# Altium PCB MFC-Card-Template.PcbDoc
Units mm, origin at the board's own origin, x right, y up, seen from the top; angles counter-clockwise.
Board outline 100 x 100 mm, 4 copper layers (Top Layer, Int1 (GND), Int2 (PWR), Bottom Layer), stack 1.369 mm thick; 3 components, 30 nets, 472 pads, 0 vias.
Unrouted connection lines stored in the file: 17.
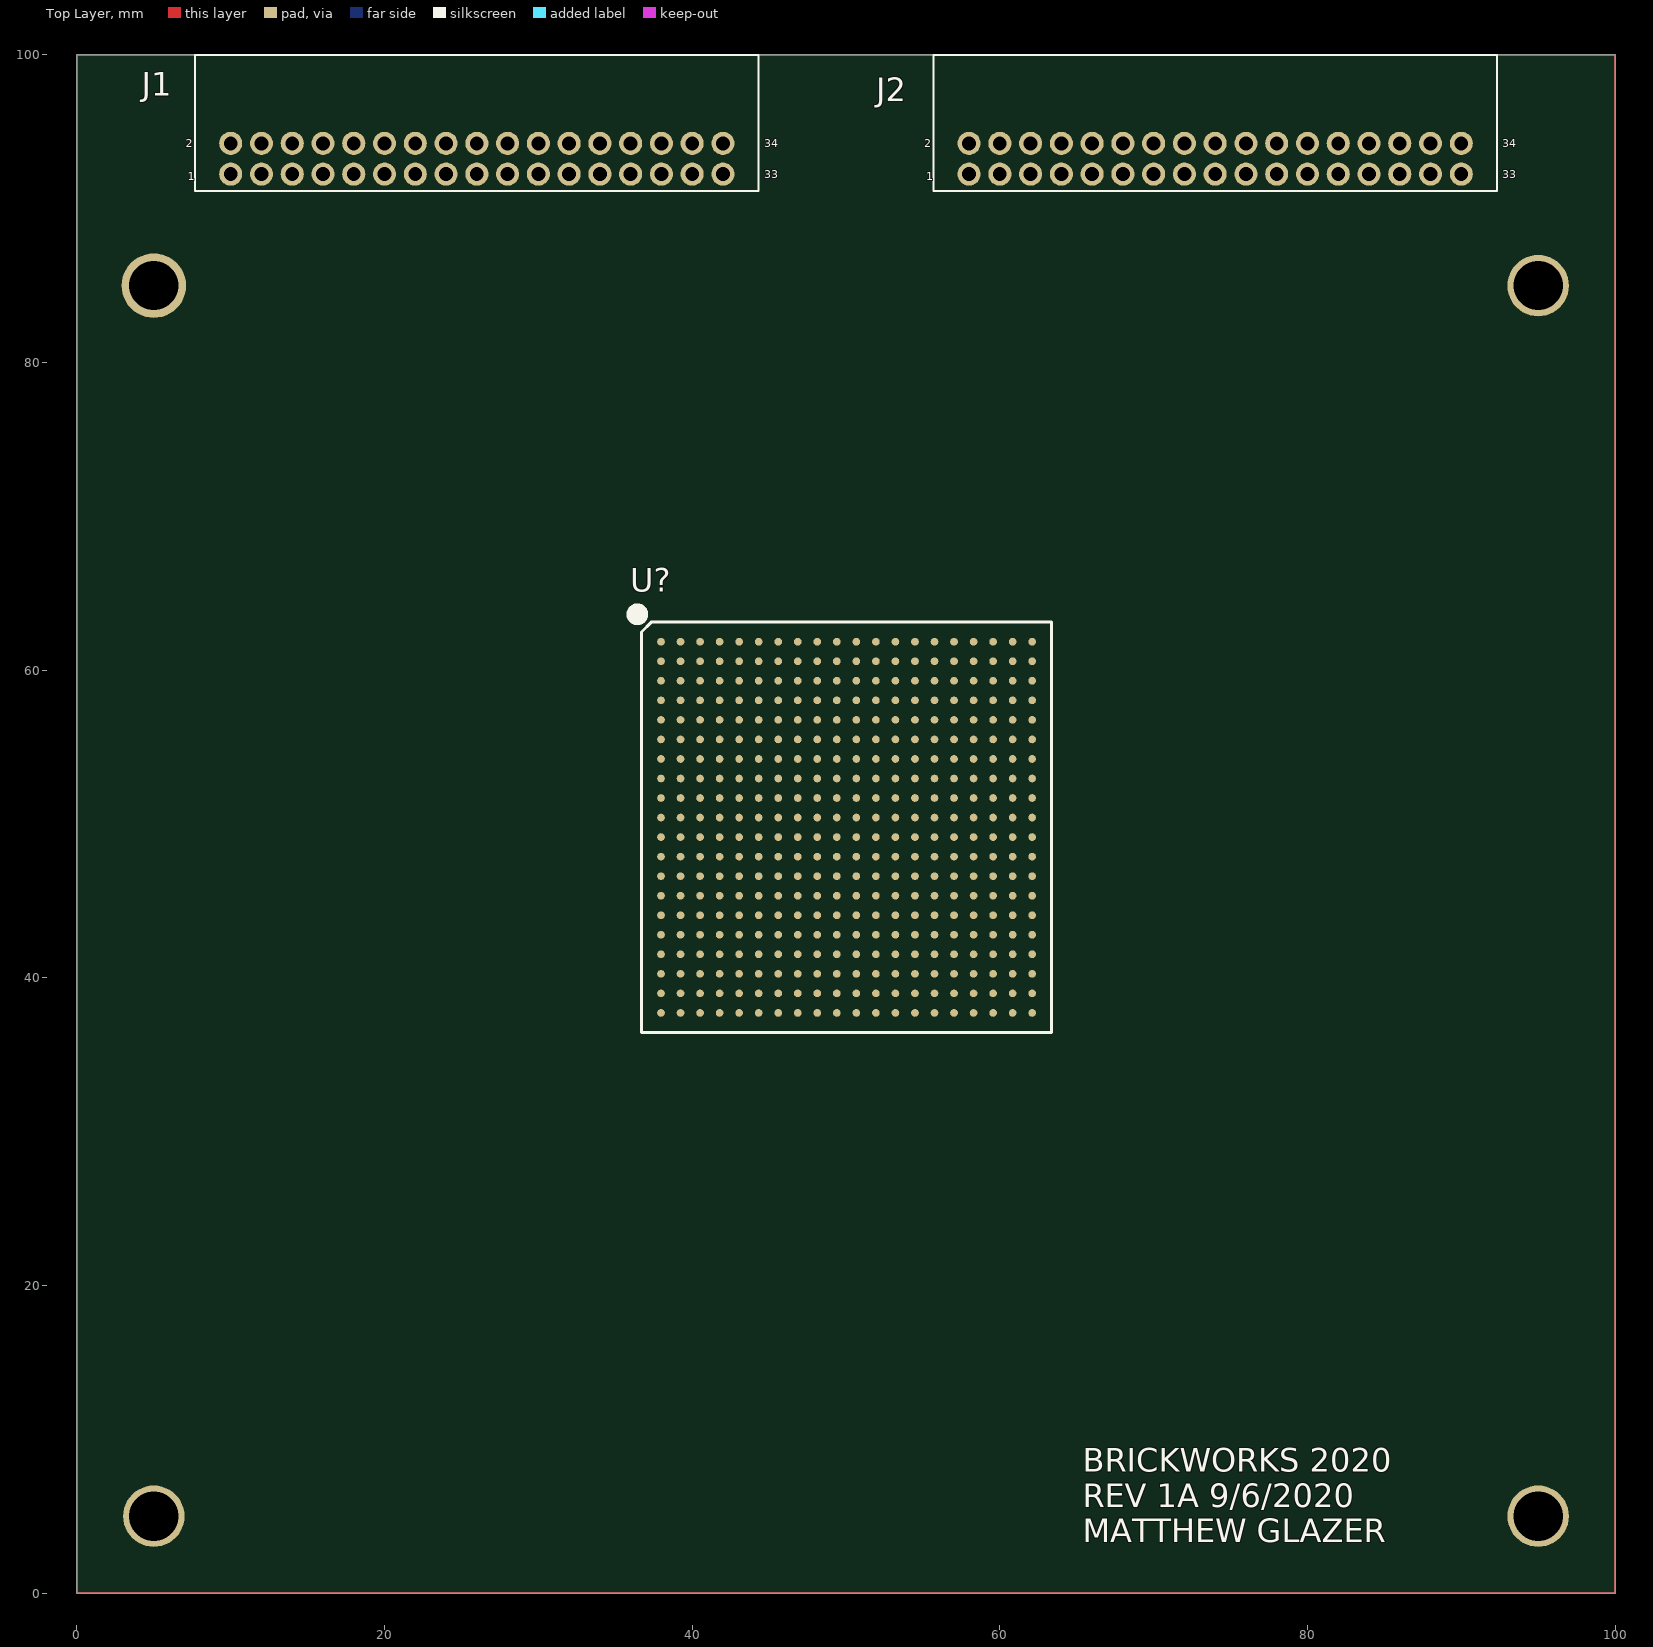
[diagram p0: Top Layer view]
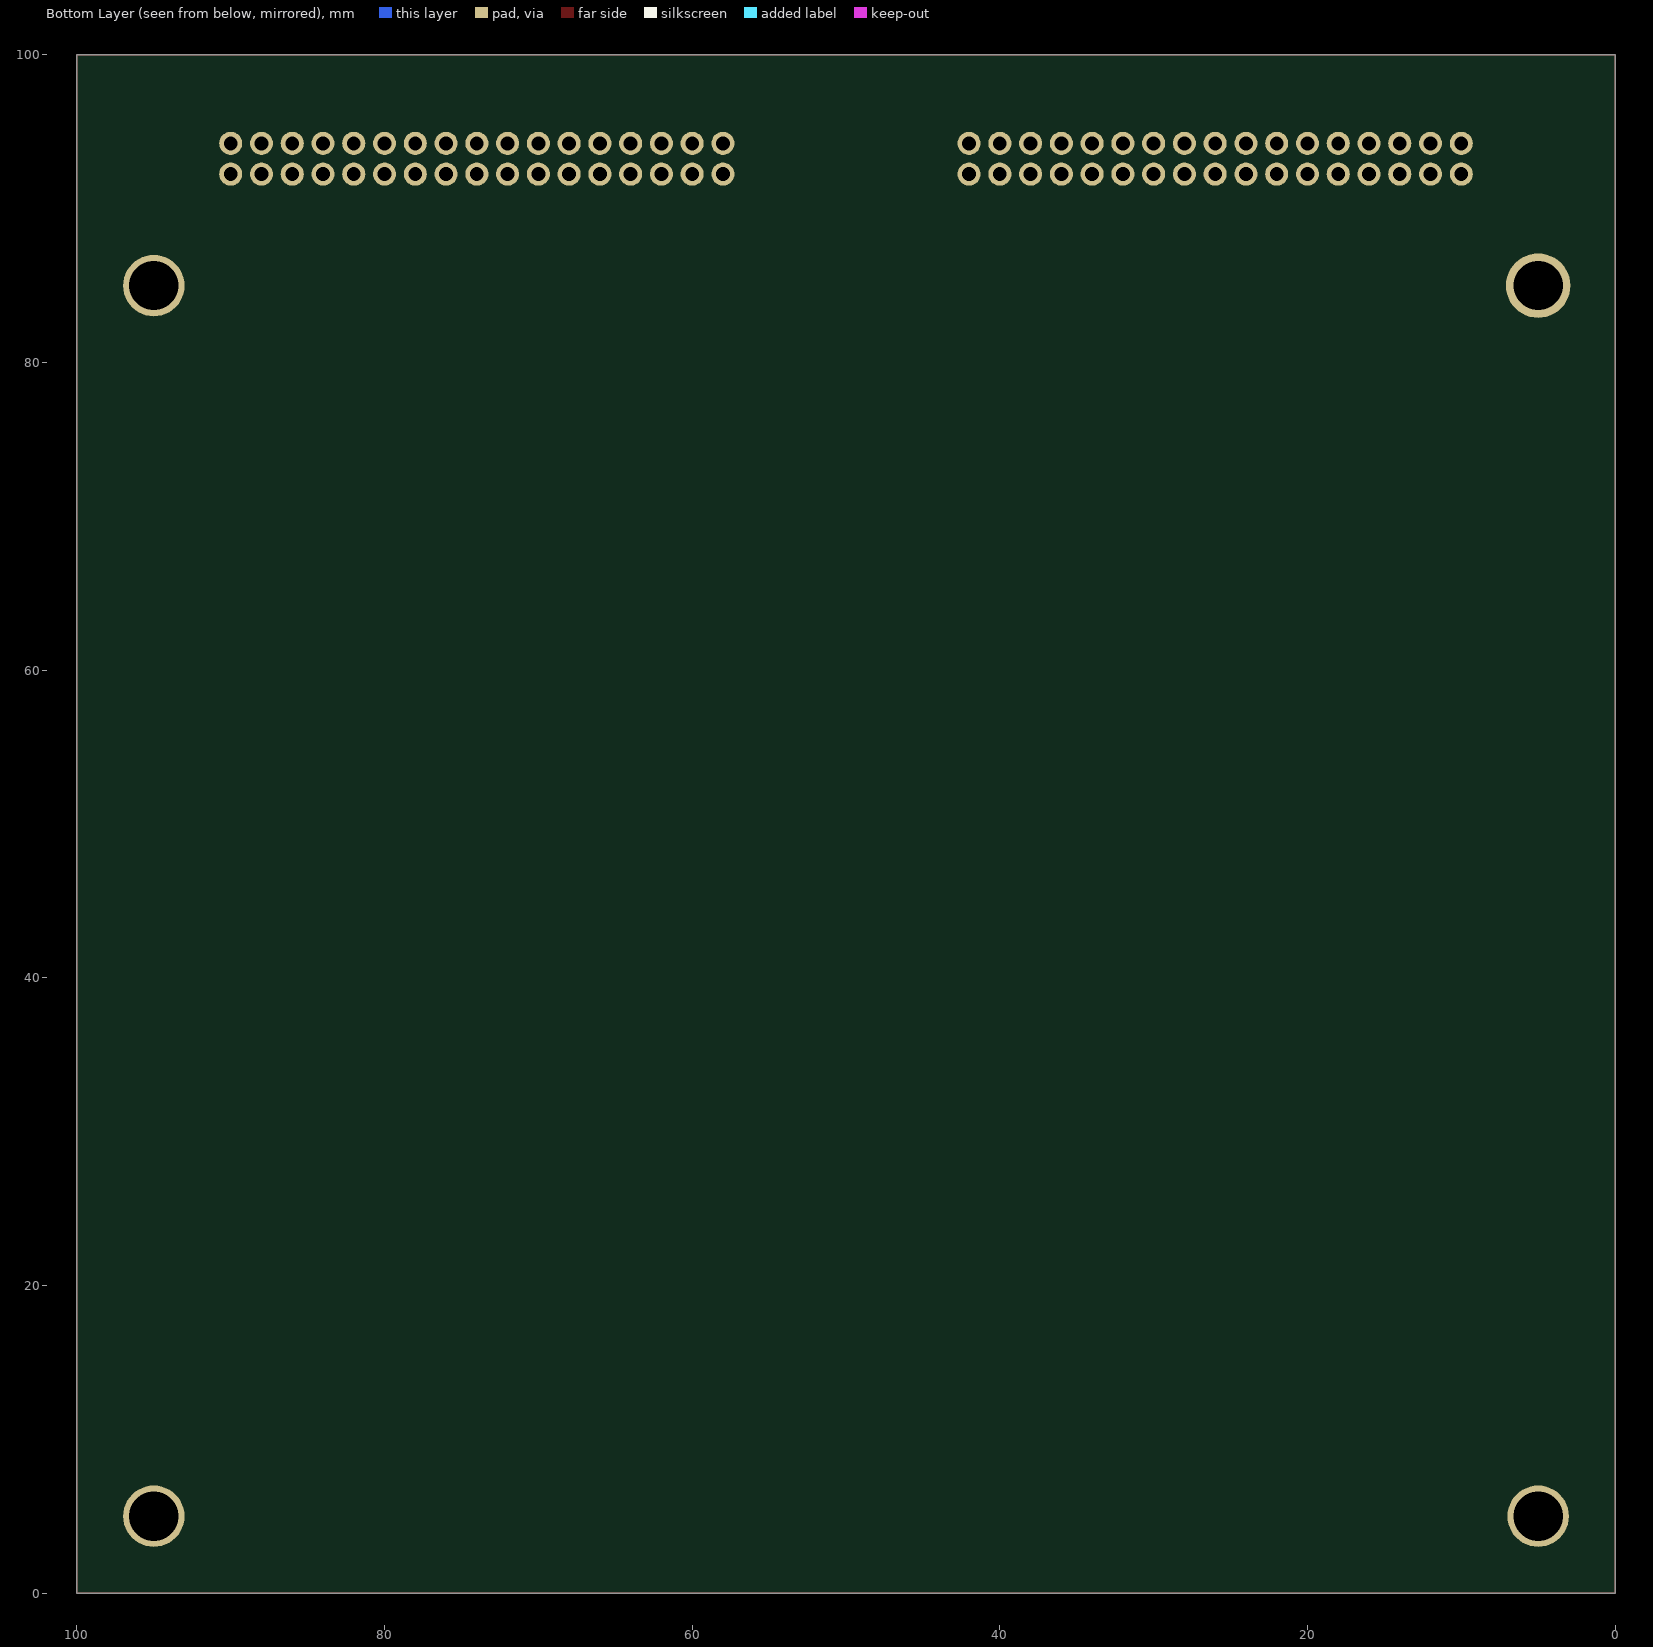
[diagram p1: Bottom Layer view, seen from below]
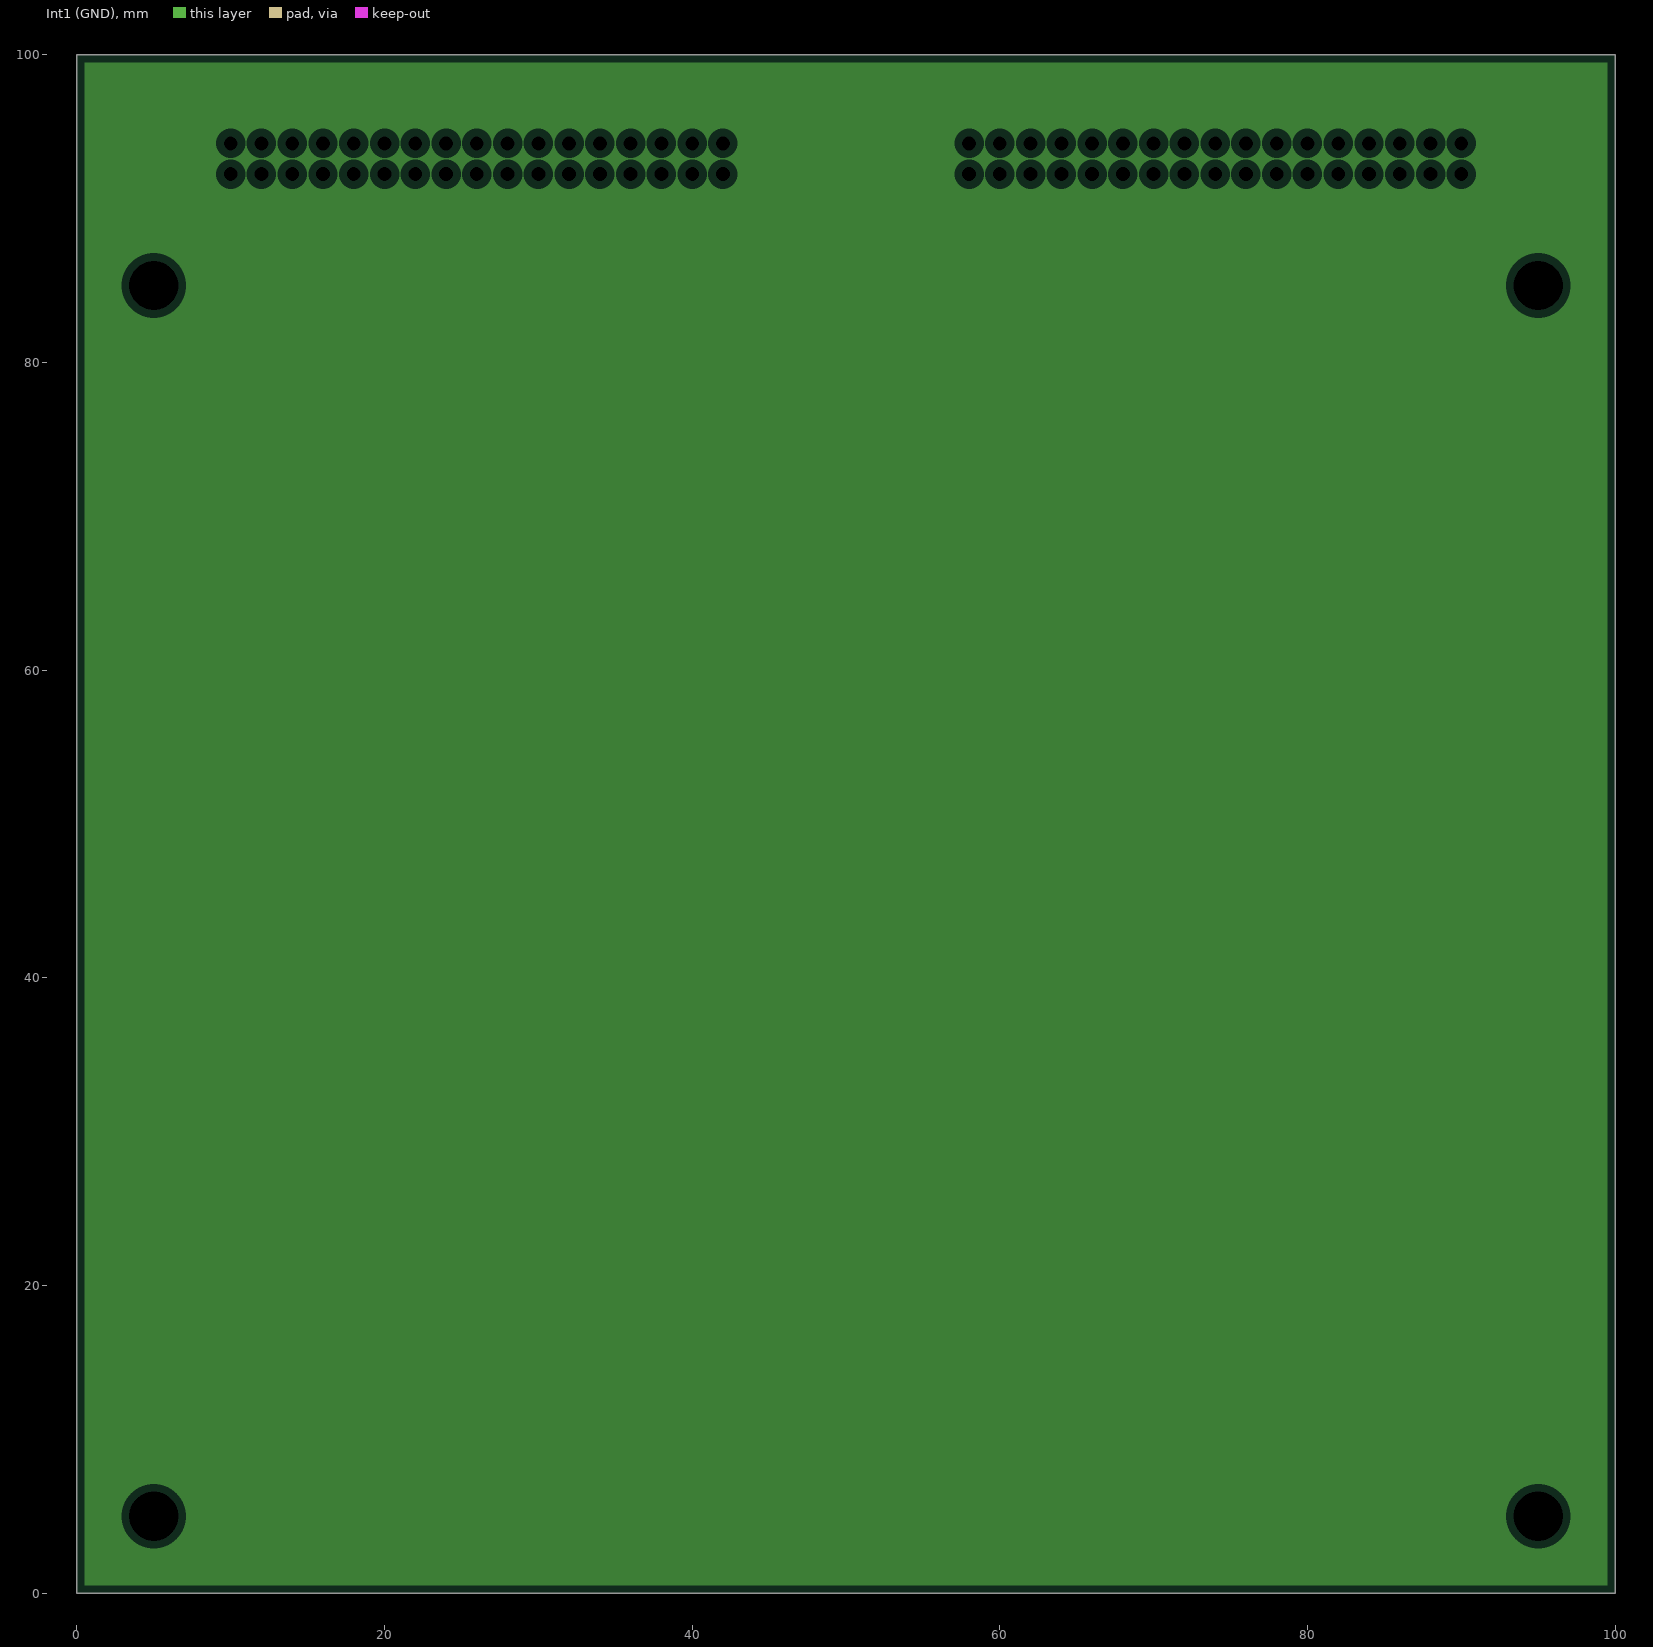
[diagram p2: Int1 (GND), clearances drawn from the general rule]
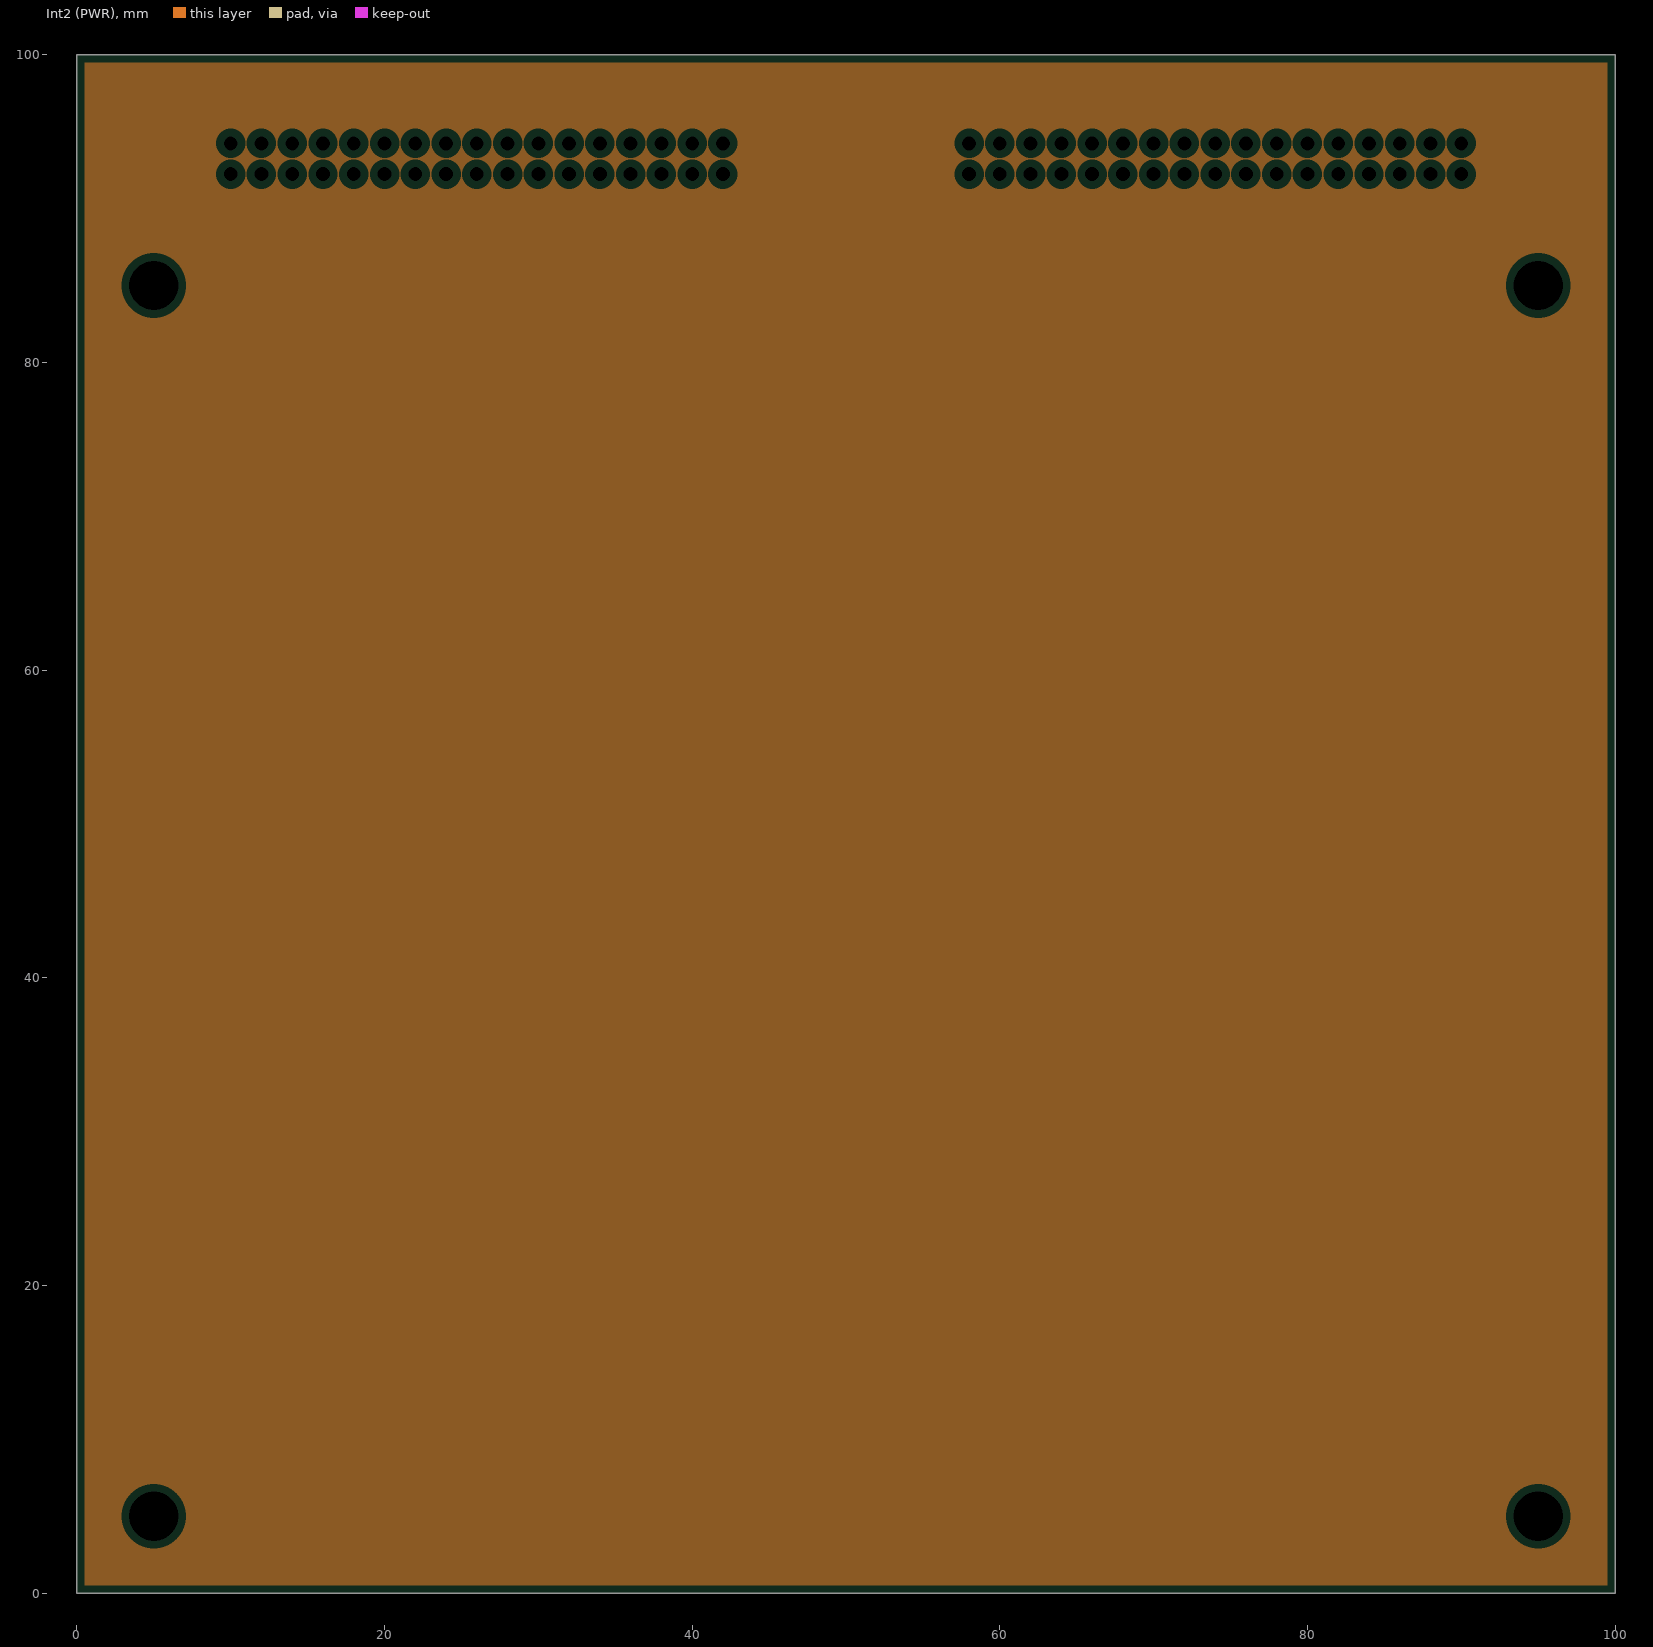
[diagram p3: Int2 (PWR), clearances drawn from the general rule]

## Layer stack, top to bottom
Top Solder: solder mask 0.0254, SM-001, Dk 4
Top Layer: signal copper 0.035
Dielectric 1: prepreg 0.1295, PP-017, Dk 4.3
Dielectric 2: prepreg 0.1295, PP-017, Dk 4.3
Int1 (GND): plane copper 0.035
Dielectric 3: core 0.7112, Core-039, Dk 4.8
Int2 (PWR): plane copper 0.035
Dielectric 4: prepreg 0.1295, PP-017, Dk 4.3
Dielectric 5: prepreg 0.1295, PP-017, Dk 4.3
Bottom Layer: signal copper 0.035
Bottom Solder: solder mask 0.0254, SM-001, Dk 4

## Board outline
0,0 100,0 100,100 0,100

## Design rules (kind name [scope] priority, off if disabled: settings)
Clearance [All] p1: gap=0.254 ignorepadtopadclearanceinfootprint=FALSE except(0: Arc-Hole Track-Hole SMDPad-Hole THPad-Hole Via-Hole Fill-Hole Poly-Hole Region-Hole Text-Hole)
PlaneClearance [All] p1: clearance=0.508
PlaneConnect [All] p1: planeconnectstyle=Relief reliefexpansion=0.508 reliefentries=4 reliefconductorwidth=0.254 reliefairgap=0.254
PolygonConnect [All] p1: connectstyle=Relief reliefconductorwidth=0.254 reliefentries=4 polygonreliefangle="90 Angle" airgapwidth=0.254
RoomDefinition Processor [InComponentClass('Processor')] p1: confinementstyle=ConfineIn formatcopy=TRUE lockcomponents=FALSE outline 101.092,1.524 216.535,1.524 216.535,64.77 101.092,64.77
RoomDefinition Interfaces [InComponentClass('Interfaces')] p2: confinementstyle=ConfineIn formatcopy=TRUE lockcomponents=FALSE outline 0,0 50.8,0 50.8,25.4 0,25.4
RoomDefinition Processor-2 [InComponentClass('Processor-2')] p3: confinementstyle=ConfineIn formatcopy=TRUE lockcomponents=FALSE outline 121.158,1.651 141.859,1.651 141.859,43.18 121.158,43.18
RoutingVias [All] p1: holewidth=0.711 width=1.27 viastyle="Through Hole" minholewidth=0.711 minwidth=1.27 maxholewidth=0.711 maxwidth=1.27
SolderMaskExpansion [All] p1: expansion=0.102
Width [All] p1: maxlimit=0.254 minlimit=0.254 preferedwidth=0.254
28 further rules are at their usual default settings.

## Classes and differential pairs
component class Interfaces: J1 J2

## Components (designator, comment, footprint, x,y, rotation, side; value= is the part's Value field where it differs from the comment)
J1 "0878333420" 0878333420 10,94.25 r0 top
J2 "0878333420" 0878333420 58,94.25 r0 top
U? "OSD3358-512M-ICB" BGA_20x20_400_1p27mm 50.018,49.764 r0 top

## Footprints (in the part's own frame and the unit in brackets; to place one, negate y for a bottom-side part, rotate by r counter-clockwise, add the part's x,y. Pads: shape width x height; smd on the part's side, far side on the other; paste and mask are expansions set on the pad)
0878333420 [mm] "34 pin milli-grid header, right-angle"
  round 1.5 hole 0.9: 1(0,-2) 2(0,0) 3(2,-2) 4(2,0) 5(4,-2) 6(4,0) 7(6,-2) 8(6,0) 9(8,-2) 10(8,0) 11(10,-2) 12(10,0) 13(12,-2) 14(12,0) 15(14,-2) 16(14,0) 17(16,-2) 18(16,0) 19(18,-2) 20(18,0) 21(20,-2) 22(20,0) 23(22,-2) 24(22,0) 25(24,-2) 26(24,0) 27(26,-2) 28(26,0) 29(28,-2) 30(28,0) 31(30,-2) 32(30,0) 33(32,-2) 34(32,0)
  silkscreen extent -2.32,-3.09 34.33,5.75, body extent -2.32,-2.25 34.33,6.4, height 6.35
BGA_20x20_400_1p27mm [mm] "400 pin 1.27mm pitch footprint"
  round 0.5 smd paste+0 mask+0.05: A1(-12.045,12.085) A2(-10.775,12.085) A3(-9.505,12.085) A4(-8.235,12.085) A5(-6.965,12.085) A6(-5.695,12.085) A7(-4.425,12.085) A8(-3.155,12.085) A9(-1.885,12.085) A10(-0.615,12.085) A11(0.655,12.085) A12(1.925,12.085) A13(3.195,12.085) A14(4.465,12.085) A15(5.735,12.085) A16(7.005,12.085) A17(8.275,12.085) A18(9.545,12.085) A19(10.815,12.085) A20(12.085,12.085) B1(-12.045,10.815) B2(-10.775,10.815) B3(-9.505,10.815) B4(-8.235,10.815) B5(-6.965,10.815) B6(-5.695,10.815) B7(-4.425,10.815) B8(-3.155,10.815) B9(-1.885,10.815) B10(-0.615,10.815) B11(0.655,10.815) B12(1.925,10.815) B13(3.195,10.815) B14(4.465,10.815) B15(5.735,10.815) B16(7.005,10.815) B17(8.275,10.815) B18(9.545,10.815) B19(10.815,10.815) B20(12.085,10.815) C1(-12.045,9.545) C2(-10.775,9.545) C3(-9.505,9.545) C4(-8.235,9.545) C5(-6.965,9.545) C6(-5.695,9.545) C7(-4.425,9.545) C8(-3.155,9.545) C9(-1.885,9.545) C10(-0.615,9.545) C11(0.655,9.545) C12(1.925,9.545) C13(3.195,9.545) C14(4.465,9.545) C15(5.735,9.545) C16(7.005,9.545) C17(8.275,9.545) C18(9.545,9.545) C19(10.815,9.545) C20(12.085,9.545) D1(-12.045,8.275) D2(-10.775,8.275) D3(-9.505,8.275) D4(-8.235,8.275) D5(-6.965,8.275) D6(-5.695,8.275) D7(-4.425,8.275) D8(-3.155,8.275) D9(-1.885,8.275) D10(-0.615,8.275) D11(0.655,8.275) D12(1.925,8.275) D13(3.195,8.275) D14(4.465,8.275) D15(5.735,8.275) D16(7.005,8.275) D17(8.275,8.275) D18(9.545,8.275) D19(10.815,8.275) D20(12.085,8.275) E1(-12.045,7.005) E2(-10.775,7.005) E3(-9.505,7.005) E4(-8.235,7.005) E5(-6.965,7.005) E6(-5.695,7.005) E7(-4.425,7.005) E8(-3.155,7.005) E9(-1.885,7.005) E10(-0.615,7.005) E11(0.655,7.005) E12(1.925,7.005) E13(3.195,7.005) E14(4.465,7.005) E15(5.735,7.005) E16(7.005,7.005) E17(8.275,7.005) E18(9.545,7.005) E19(10.815,7.005) E20(12.085,7.005) F1(-12.045,5.735) F2(-10.775,5.735) F3(-9.505,5.735) F4(-8.235,5.735) F5(-6.965,5.735) F6(-5.695,5.735) F7(-4.425,5.735) F8(-3.155,5.735) F9(-1.885,5.735) F10(-0.615,5.735) F11(0.655,5.735) F12(1.925,5.735) F13(3.195,5.735) F14(4.465,5.735) F15(5.735,5.735) F16(7.005,5.735) F17(8.275,5.735) F18(9.545,5.735) F19(10.815,5.735) F20(12.085,5.735) G1(-12.045,4.465) G2(-10.775,4.465) G3(-9.505,4.465) G4(-8.235,4.465) G5(-6.965,4.465) G6(-5.695,4.465) G7(-4.425,4.465) G8(-3.155,4.465) G9(-1.885,4.465) G10(-0.615,4.465) G11(0.655,4.465) G12(1.925,4.465) G13(3.195,4.465) G14(4.465,4.465) G15(5.735,4.465) G16(7.005,4.465) G17(8.275,4.465) G18(9.545,4.465) G19(10.815,4.465) G20(12.085,4.465) H1(-12.045,3.195) H2(-10.775,3.195) H3(-9.505,3.195) H4(-8.235,3.195) H5(-6.965,3.195) H6(-5.695,3.195) H7(-4.425,3.195) H8(-3.155,3.195) H9(-1.885,3.195) H10(-0.615,3.195) H11(0.655,3.195) H12(1.925,3.195) H13(3.195,3.195) H14(4.465,3.195) H15(5.735,3.195) H16(7.005,3.195) H17(8.275,3.195) H18(9.545,3.195) H19(10.815,3.195) H20(12.085,3.195) J1(-12.045,1.925) J2(-10.775,1.925) J3(-9.505,1.925) J4(-8.235,1.925) J5(-6.965,1.925) J6(-5.695,1.925) J7(-4.425,1.925) J8(-3.155,1.925) J9(-1.885,1.925) J10(-0.615,1.925) J11(0.655,1.925) J12(1.925,1.925) J13(3.195,1.925) J14(4.465,1.925) J15(5.735,1.925) J16(7.005,1.925) J17(8.275,1.925) J18(9.545,1.925) J19(10.815,1.925) J20(12.085,1.925) K1(-12.045,0.655) K2(-10.775,0.655) K3(-9.505,0.655) K4(-8.235,0.655) K5(-6.965,0.655) K6(-5.695,0.655) K7(-4.425,0.655) K8(-3.155,0.655) K9(-1.885,0.655) K10(-0.615,0.655) K11(0.655,0.655) K12(1.925,0.655) K13(3.195,0.655) K14(4.465,0.655) K15(5.735,0.655) K16(7.005,0.655) K17(8.275,0.655) K18(9.545,0.655) K19(10.815,0.655) K20(12.085,0.655) L1(-12.045,-0.615) L2(-10.775,-0.615) L3(-9.505,-0.615) L4(-8.235,-0.615) L5(-6.965,-0.615) L6(-5.695,-0.615) L7(-4.425,-0.615) L8(-3.155,-0.615) L9(-1.885,-0.615) L10(-0.615,-0.615) L11(0.655,-0.615) L12(1.925,-0.615) L13(3.195,-0.615) L14(4.465,-0.615) L15(5.735,-0.615) L16(7.005,-0.615) L17(8.275,-0.615) L18(9.545,-0.615) L19(10.815,-0.615) L20(12.085,-0.615) M1(-12.045,-1.885) M2(-10.775,-1.885) M3(-9.505,-1.885) M4(-8.235,-1.885) M5(-6.965,-1.885) M6(-5.695,-1.885) M7(-4.425,-1.885) M8(-3.155,-1.885) M9(-1.885,-1.885) M10(-0.615,-1.885) M11(0.655,-1.885) M12(1.925,-1.885) M13(3.195,-1.885) M14(4.465,-1.885) M15(5.735,-1.885) M16(7.005,-1.885) M17(8.275,-1.885) M18(9.545,-1.885) M19(10.815,-1.885) M20(12.085,-1.885) N1(-12.045,-3.155) N2(-10.775,-3.155) N3(-9.505,-3.155) N4(-8.235,-3.155) N5(-6.965,-3.155) N6(-5.695,-3.155) N7(-4.425,-3.155) N8(-3.155,-3.155) N9(-1.885,-3.155) N10(-0.615,-3.155) N11(0.655,-3.155) N12(1.925,-3.155) N13(3.195,-3.155) N14(4.465,-3.155) N15(5.735,-3.155) N16(7.005,-3.155) N17(8.275,-3.155) N18(9.545,-3.155) N19(10.815,-3.155) N20(12.085,-3.155) P1(-12.045,-4.425) P2(-10.775,-4.425) P3(-9.505,-4.425) P4(-8.235,-4.425) P5(-6.965,-4.425) P6(-5.695,-4.425) P7(-4.425,-4.425) P8(-3.155,-4.425) P9(-1.885,-4.425) P10(-0.615,-4.425) P11(0.655,-4.425) P12(1.925,-4.425) P13(3.195,-4.425) P14(4.465,-4.425) P15(5.735,-4.425) P16(7.005,-4.425) P17(8.275,-4.425) P18(9.545,-4.425) P19(10.815,-4.425) P20(12.085,-4.425) R1(-12.045,-5.695) R2(-10.775,-5.695) R3(-9.505,-5.695) R4(-8.235,-5.695) R5(-6.965,-5.695) R6(-5.695,-5.695) R7(-4.425,-5.695) R8(-3.155,-5.695) R9(-1.885,-5.695) R10(-0.615,-5.695) R11(0.655,-5.695) R12(1.925,-5.695) R13(3.195,-5.695) R14(4.465,-5.695) R15(5.735,-5.695) R16(7.005,-5.695) R17(8.275,-5.695) R18(9.545,-5.695) R19(10.815,-5.695) R20(12.085,-5.695) T1(-12.045,-6.965) T2(-10.775,-6.965) T3(-9.505,-6.965) T4(-8.235,-6.965) T5(-6.965,-6.965) T6(-5.695,-6.965) T7(-4.425,-6.965) T8(-3.155,-6.965) T9(-1.885,-6.965) T10(-0.615,-6.965) T11(0.655,-6.965) T12(1.925,-6.965) T13(3.195,-6.965) T14(4.465,-6.965) T15(5.735,-6.965) T16(7.005,-6.965) T17(8.275,-6.965) T18(9.545,-6.965) T19(10.815,-6.965) T20(12.085,-6.965) U1(-12.045,-8.235) U2(-10.775,-8.235) U3(-9.505,-8.235) U4(-8.235,-8.235) U5(-6.965,-8.235) U6(-5.695,-8.235) U7(-4.425,-8.235) U8(-3.155,-8.235) U9(-1.885,-8.235) U10(-0.615,-8.235) U11(0.655,-8.235) U12(1.925,-8.235) U13(3.195,-8.235) U14(4.465,-8.235) U15(5.735,-8.235) U16(7.005,-8.235) U17(8.275,-8.235) U18(9.545,-8.235) U19(10.815,-8.235) U20(12.085,-8.235) V1(-12.045,-9.505) V2(-10.775,-9.505) V3(-9.505,-9.505) V4(-8.235,-9.505) V5(-6.965,-9.505) V6(-5.695,-9.505) V7(-4.425,-9.505) V8(-3.155,-9.505) V9(-1.885,-9.505) V10(-0.615,-9.505) V11(0.655,-9.505) V12(1.925,-9.505) V13(3.195,-9.505) V14(4.465,-9.505) V15(5.735,-9.505) V16(7.005,-9.505) V17(8.275,-9.505) V18(9.545,-9.505) V19(10.815,-9.505) V20(12.085,-9.505) W1(-12.045,-10.775) W2(-10.775,-10.775) W3(-9.505,-10.775) W4(-8.235,-10.775) W5(-6.965,-10.775) W6(-5.695,-10.775) W7(-4.425,-10.775) W8(-3.155,-10.775) W9(-1.885,-10.775) W10(-0.615,-10.775) W11(0.655,-10.775) W12(1.925,-10.775) W13(3.195,-10.775) W14(4.465,-10.775) W15(5.735,-10.775) W16(7.005,-10.775) W17(8.275,-10.775) W18(9.545,-10.775) W19(10.815,-10.775) W20(12.085,-10.775) Y1(-12.045,-12.045) Y2(-10.775,-12.045) Y3(-9.505,-12.045) Y4(-8.235,-12.045) Y5(-6.965,-12.045) Y6(-5.695,-12.045) Y7(-4.425,-12.045) Y8(-3.155,-12.045) Y9(-1.885,-12.045) Y10(-0.615,-12.045) Y11(0.655,-12.045) Y12(1.925,-12.045) Y13(3.195,-12.045) Y14(4.465,-12.045) Y15(5.735,-12.045) Y16(7.005,-12.045) Y17(8.275,-12.045) Y18(9.545,-12.045) Y19(10.815,-12.045) Y20(12.085,-12.045)
  silkscreen extent -13.93,-13.32 13.35,14.22, body extent -13.48,-13.48 13.52,13.52, height 2.6

## Part data
J1 J2: Supplier Part Number 1=WM20555-ND, Supplier 1=Digi-Key
U?: "Octavo Systems OSD335x Family SiP:  27mm x 27mm, 1.27mm pitch 400 pin BGA contains AM3358, 512MB DDR3, TPS65217C, TL5209, 4KB EEPROM, 4GB eMMC, 24MHz oscillator, and passives.  Industrial Temperature (case):  -40C to 85C.", Manufacturer="Octavo Systems", Package=FBGA, PartNumber=OSD3358-512M-BCB, ComponentLinkURL=www.octavosystems.com, Mounting Technology="Surface Mount", PackageDescription="400-Ball Grid Array, 21x21x2.6 mm, Pitch 1.27 mm", PackageReference=FBGA-400, Pin Count=400-ball

## Free pads (board coordinates)
  round 4 hole 3.2 unplated: 11(5,5) 11(95,5) 11(95,85)
  round 4.2 hole 3.2 unplated: 11(5,85)

## Nets (pads, with @x,y where several pads share a name; then routed paths per layer and width w, separated by ;. In a path a pad name is that pad's centre, name@x,y a point inside that pad or via, vN(x,y) a via of type N, cw(c..) or ccw(c..) an arc to the next point about the centre after c; other vN are vias at no path point)
+5: J1.5 J1.6
+12: J1.1 J1.2
GND: J1.3 J1.4 J1.7 J1.8 J1.11 J1.12 J2.5 J2.6 J2.11 J2.12 J2.17 J2.18 J2.23 J2.24 J2.29 J2.30
NetJ1_13: J1.13
NetJ1_14: J1.14
NetJ1_15: J1.15
NetJ1_16: J1.16
NetJ1_17: J1.17
NetJ1_18: J1.18
NetJ1_19: J1.19
NetJ1_20: J1.20
NetJ1_21: J1.21
NetJ1_22: J1.22
NetJ1_23: J1.23
NetJ1_24: J1.24
NetJ1_25: J1.25
NetJ1_26: J1.26
NetJ1_27: J1.27
NetJ1_28: J1.28
NetJ1_29: J1.29
NetJ1_30: J1.30
NetJ1_31: J1.31
NetJ1_32: J1.32
NetJ1_33: J1.33
NetU?_F8: 
NetU?_F12: 
NetU?_F14: 
NetU?_K10: 
NetU?_N7: 
SYS_ADC_1.8V: 
pads on no net: J1.9 J1.10 J1.34 J2.1 J2.2 J2.3 J2.4 J2.7 J2.8 J2.9 J2.10 J2.13 J2.14 J2.15 J2.16 J2.19 J2.20 J2.21 J2.22 J2.25 J2.26 J2.27 J2.28 J2.31 J2.32 J2.33 J2.34 U?.A1 U?.A2 U?.A3 U?.A4 U?.A5 U?.A6 U?.A7 U?.A8 U?.A9 U?.A10 U?.A11 U?.A12 U?.A13 U?.A14 U?.A15 U?.A16 U?.A17 U?.A18 U?.A19 U?.A20 U?.B1 U?.B2 U?.B3 U?.B4 U?.B5 U?.B6 U?.B7 U?.B8 U?.B9 U?.B10 U?.B11 U?.B12 U?.B13 U?.B14 U?.B15 U?.B16 U?.B17 U?.B18 U?.B19 U?.B20 U?.C1 U?.C2 U?.C3 U?.C4 U?.C5 U?.C6 U?.C7 U?.C8 U?.C9 U?.C10 U?.C11 U?.C12 U?.C13 U?.C14 U?.C15 U?.C16 U?.C17 U?.C18 U?.C19 U?.C20 U?.D1 U?.D2 U?.D3 U?.D4 U?.D5 U?.D6 U?.D7 U?.D8 U?.D9 U?.D10 U?.D11 U?.D12 U?.D13 U?.D14 U?.D15 U?.D16 U?.D17 U?.D18 U?.D19 U?.D20 U?.E1 U?.E2 U?.E3 U?.E4 U?.E5 U?.E6 U?.E7 U?.E8 U?.E9 U?.E10 U?.E11 U?.E12 U?.E13 U?.E14 U?.E15 U?.E16 U?.E17 U?.E18 U?.E19 U?.E20 U?.F1 U?.F2 U?.F3 U?.F4 U?.F5 U?.F6 U?.F7 U?.F8 U?.F9 U?.F10 U?.F11 U?.F12 U?.F13 U?.F14 U?.F15 U?.F16 U?.F17 U?.F18 U?.F19 U?.F20 U?.G1 U?.G2 U?.G3 U?.G4 U?.G5 U?.G6 U?.G7 U?.G8 U?.G9 U?.G10 U?.G11 U?.G12 U?.G13 U?.G14 U?.G15 U?.G16 U?.G17 U?.G18 U?.G19 U?.G20 U?.H1 U?.H2 U?.H3 U?.H4 U?.H5 U?.H6 U?.H7 U?.H8 U?.H9 U?.H10 U?.H11 U?.H12 U?.H13 U?.H14 U?.H15 U?.H16 U?.H17 U?.H18 U?.H19 U?.H20 U?.J1 U?.J2 U?.J3 U?.J4 U?.J5 U?.J6 U?.J7 U?.J8 U?.J9 U?.J10 U?.J11 U?.J12 U?.J13 U?.J14 U?.J15 U?.J16 U?.J17 U?.J18 U?.J19 U?.J20 U?.K1 U?.K2 U?.K3 U?.K4 U?.K5 U?.K6 U?.K7 U?.K8 U?.K9 U?.K10 U?.K11 U?.K12 U?.K13 U?.K14 U?.K15 U?.K16 U?.K17 U?.K18 U?.K19 U?.K20 U?.L1 U?.L2 U?.L3 U?.L4 U?.L5 U?.L6 U?.L7 U?.L8 U?.L9 U?.L10 U?.L11 U?.L12 U?.L13 U?.L14 U?.L15 U?.L16 U?.L17 U?.L18 U?.L19 U?.L20 U?.M1 U?.M2 U?.M3 U?.M4 U?.M5 U?.M6 U?.M7 U?.M8 U?.M9 U?.M10 U?.M11 U?.M12 U?.M13 U?.M14 U?.M15 U?.M16 U?.M17 U?.M18 U?.M19 U?.M20 U?.N1 U?.N2 U?.N3 U?.N4 U?.N5 U?.N6 U?.N7 U?.N8 U?.N9 U?.N10 U?.N11 U?.N12 U?.N13 U?.N14 U?.N15 U?.N16 U?.N17 U?.N18 U?.N19 U?.N20 U?.P1 U?.P2 U?.P3 U?.P4 U?.P5 U?.P6 U?.P7 U?.P8 U?.P9 U?.P10 U?.P11 U?.P12 U?.P13 U?.P14 U?.P15 U?.P16 U?.P17 U?.P18 U?.P19 U?.P20 U?.R1 U?.R2 U?.R3 U?.R4 U?.R5 U?.R6 U?.R7 U?.R8 U?.R9 U?.R10 U?.R11 U?.R12 U?.R13 U?.R14 U?.R15 U?.R16 U?.R17 U?.R18 U?.R19 U?.R20 U?.T1 U?.T2 U?.T3 U?.T4 U?.T5 U?.T6 U?.T7 U?.T8 U?.T9 U?.T10 U?.T11 U?.T12 U?.T13 U?.T14 U?.T15 U?.T16 U?.T17 U?.T18 U?.T19 U?.T20 U?.U1 U?.U2 U?.U3 U?.U4 U?.U5 U?.U6 U?.U7 U?.U8 U?.U9 U?.U10 U?.U11 U?.U12 U?.U13 U?.U14 U?.U15 U?.U16 U?.U17 U?.U18 U?.U19 U?.U20 U?.V1 U?.V2 U?.V3 U?.V4 U?.V5 U?.V6 U?.V7 U?.V8 U?.V9 U?.V10 U?.V11 U?.V12 U?.V13 U?.V14 U?.V15 U?.V16 U?.V17 U?.V18 U?.V19 U?.V20 U?.W1 U?.W2 U?.W3 U?.W4 U?.W5 U?.W6 U?.W7 U?.W8 U?.W9 U?.W10 U?.W11 U?.W12 U?.W13 U?.W14 U?.W15 U?.W16 U?.W17 U?.W18 U?.W19 U?.W20 U?.Y1 U?.Y2 U?.Y3 U?.Y4 U?.Y5 U?.Y6 U?.Y7 U?.Y8 U?.Y9 U?.Y10 U?.Y11 U?.Y12 U?.Y13 U?.Y14 U?.Y15 U?.Y16 U?.Y17 U?.Y18 U?.Y19 U?.Y20
copper on no net: | length 400
  Top Layer w0.127: 0,0 100,0 100,100 0,100 0,0

## Polygon pours and split planes (outlines as drawn)
no net on Int1 (GND) (split plane): 99.49,0.51 0.51,0.51 0.51,99.49 99.49,99.49
no net on Int2 (PWR) (split plane): 99.49,0.51 0.51,0.51 0.51,99.49 99.49,99.49

## Silkscreen, mask and mechanical layers (free items; w line width, h text height)
Top Overlay:
  text "BRICKWORKS 2020 / REV 1A 9/6/2020 / MATTHEW GLAZER" at 65.405,3.302 h1.52
  text "BRICKWORKS 2020 / REV 1A 9/6/2020 / MATTHEW GLAZER" at 180.086,-182.245 h1.52
  text "BRICKWORKS 2020 / REV 1A 9/6/2020 / MATTHEW GLAZER" at 170.18,-182.499 h1.52
  text "BRICKWORKS 2020 / REV 1A 9/6/2020 / MATTHEW GLAZER" at 172.339,-188.595 h1.52
  text "BRICKWORKS 2020 / REV 1A 9/6/2020 / MATTHEW GLAZER" at 174.498,-196.723 h1.52

## Text inside footprints (layer, text, board x,y; h text height)
J1: Top Overlay "34" at 44.671,93.996 h0.51; Top Overlay "33" at 44.671,91.964 h0.51; Top Overlay "2" at 7.079,93.996 h0.51; Top Overlay "1" at 7.206,91.837 h0.51
J2: Top Overlay "34" at 92.671,93.996 h0.51; Top Overlay "33" at 92.671,91.964 h0.51; Top Overlay "2" at 55.079,93.996 h0.51; Top Overlay "1" at 55.206,91.837 h0.51